# EAGLE board matchbox_ble_v01 (EAGLE 7.4.0)
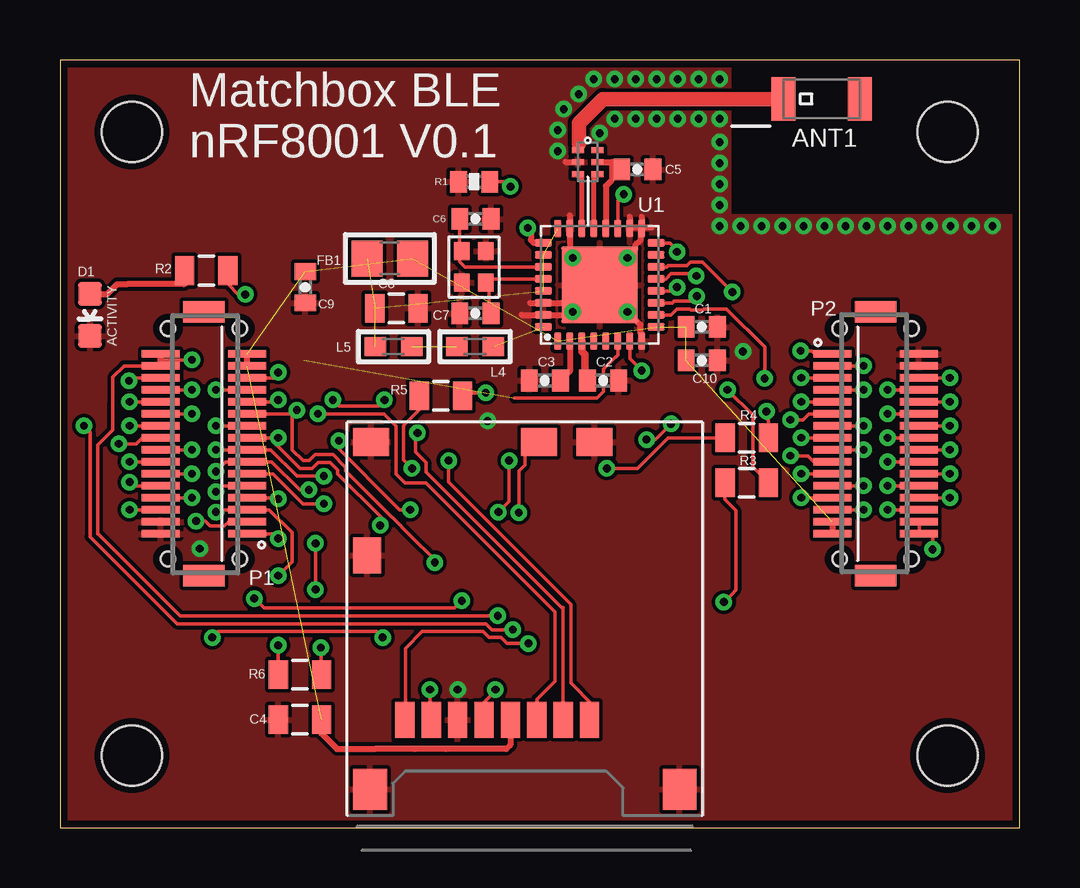
[diagram p0: board, top side]
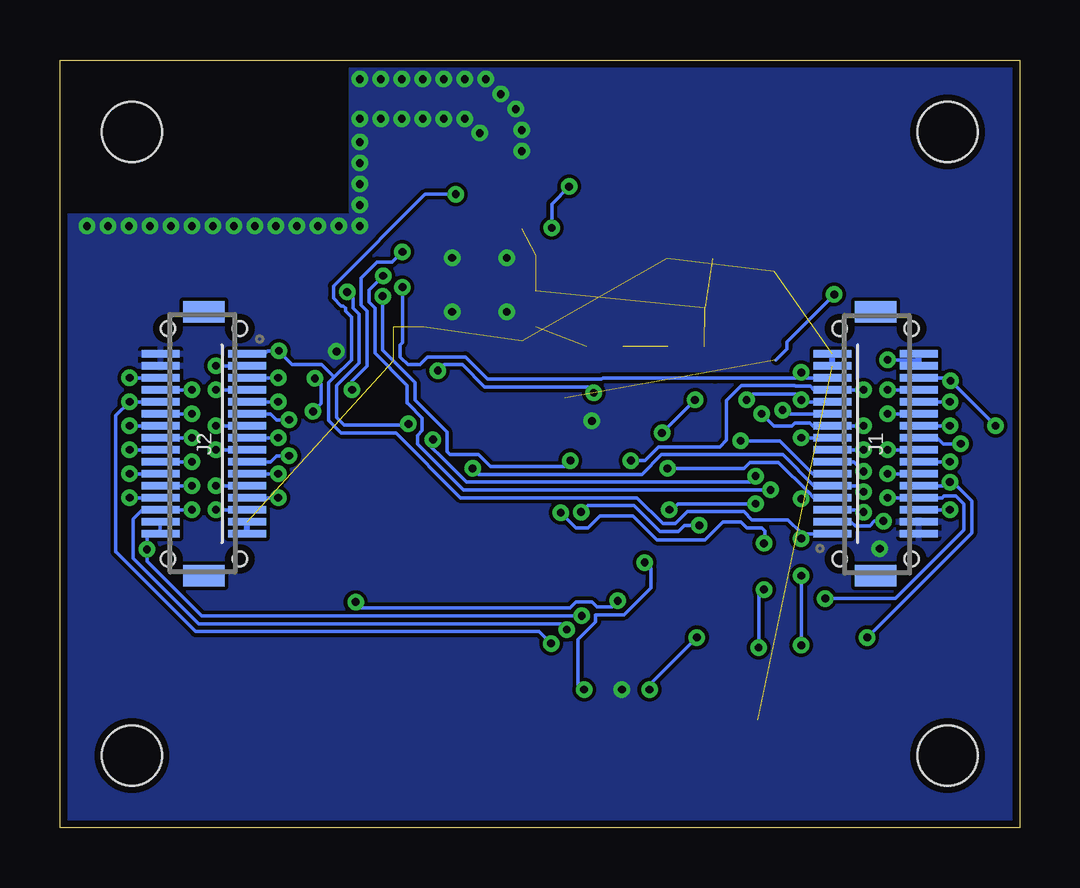
[diagram p1: board, bottom side, seen from below]

Size 40 x 32 mm. Coordinates in mm from the lower left corner, seen from the top.
Outline: 0,0 40,0 40,32 0,32 0,0
Copper layers (1*16): Top 0.0356mm / dielectric 1.5011mm / Bottom 0.0356mm
Design rules "LaenPCBOrder (2) *": minimum track width 6mil, minimum drill 13mil, track to track 6mil, track to pad 6mil, pad to pad 6mil, via to via 6mil, smd to smd 6mil, copper to edge 12mil, drill to drill 6mil, minimum pad ring 7mil, minimum via ring 7mil, stop-mask expansion 14mil, vias tented up to drill 14mil, thermal gap 6mil
Holes 2.5 mm at 3,29 37,29 37,3 3,3
tRestrict: 2 lines
bRestrict: 2 lines

## Footprints (pad centres in the part's own frame; a part is rotated, then mirrored left to right if it is on the bottom)
2450AT18A100 = smd 1 x 1.8: 1 1.6,0; 2 -1.6,0
0402-CAP = smd 0.7 x 0.9: 1 -0.65,0; 2 0.65,0
0805 = smd 0.8 x 1.2: 1 -0.9,0; 2 0.9,0
LED-0603 = smd 1 x 1: A 0,-0.877; C 0,0.877
0805' = smd 1.3 x 1.5: 1 -0.95,0; 2 0.95,0
DF12-32-DS = smd 0.3 x 1.6: 1 -3.75,1.8; 2 -3.75,-1.8; 3 -3.25,1.8; 4 -3.25,-1.8; 5 -2.75,1.8; 6 -2.75,-1.8; 7 -2.25,1.8; 8 -2.25,-1.8; 9 -1.75,1.8; 10 -1.75,-1.8; 11 -1.25,1.8; 12 -1.25,-1.8; 13 -0.75,1.8; 14 -0.75,-1.8; 15 -0.25,1.8; 16 -0.25,-1.8; 17 0.25,1.8; 18 0.25,-1.8; 19 0.75,1.8; 20 0.75,-1.8; 21 1.25,1.8; 22 1.25,-1.8; 23 1.75,1.8; 24 1.75,-1.8; 25 2.25,1.8; 26 2.25,-1.8; 27 2.75,1.8; 28 2.75,-1.8; 29 3.25,1.8; 30 3.25,-1.8; 31 3.75,1.8; 32 3.75,-1.8 | smd 0.889 x 1.727: F1 -5.5,0; F2 5.5,0 | hole 0.6: -4.8,1.5; 4.8,1.5
_0603 = smd 0.9 x 0.8: 1 -0.762,0; 2 0.762,0
DF12-32-DP = smd 0.3 x 1.6: 1 -3.75,-1.8; 2 -3.75,1.8; 3 -3.25,-1.8; 4 -3.25,1.8; 5 -2.75,-1.8; 6 -2.75,1.8; 7 -2.25,-1.8; 8 -2.25,1.8; 9 -1.75,-1.8; 10 -1.75,1.8; 11 -1.25,-1.8; 12 -1.25,1.8; 13 -0.75,-1.8; 14 -0.75,1.8; 15 -0.25,-1.8; 16 -0.25,1.8; 17 0.25,-1.8; 18 0.25,1.8; 19 0.75,-1.8; 20 0.75,1.8; 21 1.25,-1.8; 22 1.25,1.8; 23 1.75,-1.8; 24 1.75,1.8; 25 2.25,-1.8; 26 2.25,1.8; 27 2.75,-1.8; 28 2.75,1.8; 29 3.25,-1.8; 30 3.25,1.8; 31 3.75,-1.8; 32 3.75,1.8 | smd 0.889 x 1.727: F1 -5.5,0; F2 5.5,0 | hole 0.6: -4.8,1.5; 4.8,1.5
0402-RES = smd 0.7 x 0.9: 1 -0.65,0; 2 0.65,0
ATMEL_QFN32 = smd 0.711 x 0.305: 1 -2.351,1.75; 2 -2.351,1.25; 3 -2.351,0.75; 4 -2.351,0.25; 5 -2.351,-0.25; 6 -2.351,-0.75; 7 -2.351,-1.25; 8 -2.351,-1.75; 17 2.351,-1.75; 18 2.351,-1.25; 19 2.351,-0.75; 20 2.351,-0.25; 21 2.351,0.25; 22 2.351,0.75; 23 2.351,1.25; 24 2.351,1.75 | smd 0.305 x 0.711: 9 -1.75,-2.351; 10 -1.25,-2.351; 11 -0.75,-2.351; 12 -0.25,-2.351; 13 0.25,-2.351; 14 0.75,-2.351; 15 1.25,-2.351; 16 1.75,-2.351; 25 1.75,2.351; 26 1.25,2.351; 27 0.75,2.351; 28 0.25,2.351; 29 -0.25,2.351; 30 -0.75,2.351; 31 -1.25,2.351; 32 -1.75,2.351 | smd 3.2 x 3.2: EXP 0,0
2450BM14A0002 = smd 0.25 x 0.5: 1 0.5,0.4; 2 0,0.4; 3 -0.5,0.4; 4 -0.5,-0.4; 5 0,-0.4; 6 0.5,-0.4
MOLEX_MICROSD_PP = smd 0.8 x 1.5: 1 -2.7,-3.75; 2 -1.6,-3.75; 3 -0.5,-3.75; 4 0.6,-3.75; 5 1.7,-3.75; 6 2.8,-3.75; 7 3.9,-3.75; 8 5,-3.75 | smd 1.5 x 1.15: DET -0.6,-15.325; M3 -2.9,-15.325; M4 6.4,-15.325 | smd 1.4 x 1.7: M1 -6.45,-0.85; M2 6.45,-0.85 | smd 1.15 x 1.5: M5 6.575,-10.6
ABM11 = smd 0.75 x 0.65: 1 -0.65,-0.5; 2 0.65,-0.5; 3 0.65,0.5; 4 -0.65,0.5

## Placement (x,y rotation side)
ANT1  ANT1  [2450AT18A100]  31.75,30.38 180 top
C1  0.1uF  [0402-CAP]  26.75,20.88 0 top
C2  33nF  [0402-CAP]  22.64,18.64 0 top
C3  0.1uF  [0402-CAP]  20.21,18.64 180 top
C4  1uF  [0805]  10,4.5 180 top
C5  2.2nF  [0402-CAP]  24.06,27.44 0 top
C6  8.2pF  [0402-CAP]  17.31,25.38 0 top
C7  8.2pF  [0402-CAP]  17.31,21.44 180 top
C8  0.1µF  [0805]  14.03,21.65 0 top
C9  2.2nF  [0402-CAP]  10.22,22.52 270 top
C10  1uF  [0402-CAP]  26.75,19.48 0 top
D1  BLUE  [LED-0603]  1.25,21.38 180 top
FB1  MMZ1608B121C  [0805']  13.75,23.73 180 top
J1  DF12-32-DS  [DF12-32-DS]  6,16 90 bottom
J2  DF12-32-DS  [DF12-32-DS]  34,16 270 bottom
L4  10µH  [_0603]  17.3,20.05 180 top
L5  15nH  [_0603]  13.9,20.05 180 top
P1  DF12-32-DP  [DF12-32-DP]  6,16 90 top
P2  DF12-32-DP  [DF12-32-DP]  34,16 270 top
R1  22K  [0402-RES]  17.26,26.93 180 top
R2  1K  [0805]  6.1,23.23 0 top
R3  0K  [0805]  28.62,14.38 0 top
R4  0K  [0805]  28.62,16.25 0 top
R5  0K  [0805]  15.88,18 0 top
R6  0K  [0805]  10,6.38 0 top
U1  NRF8001  [ATMEL_QFN32]  22.5,22.62 90 top
U5  2450BM14A0002  [2450BM14A0002]  22,27.75 90 top
U$1  MOLEX_MICROSD_PP  [MOLEX_MICROSD_PP]  19.38,0.75 180 top
Y1  8Y-16.000MAAV-T  [ABM11]  17.25,23.38 270 top

## Library data of the parts
ANT1 = tinycircuits; PARTNO: AS-ITM-00132
C1-C7 C9 C10 R1-R6 = SparkFun-Passives
C8 = SparkFun-Capacitors
D1 = SparkFun-LED
FB1 L4 L5 = microbuilder
J1 J2 = micro1292; PARTNO: AS-ITM-00012
P1 P2 = micro1292; PARTNO: AS-ITM-00015
U1 = rf_ble
U5 = tinycircuits; PARTNO: AS-ITM-00114
U$1 = molexmicrosd
Y1 = micro1292; PARTNO: AS-ITM-00228

## Nets
ACTIVE: R2.2 U1.6
ANT1: U1.21 U5.4
ANT2: U1.22 U5.3
AVDD: C8.1 FB1.2 L5.2 U1.24 U1.26 U1.29
DCC: L4.1 U1.32
DET: R6.2 U$1.DET
GND: C1.2 C2.2 C3.2 C4.2 C5.2 C6.2 C7.2 C8.2 C9.2 C10.2 D1.C J1.2 J1.4 J2.2 J2.4 P1.2 P1.4 P2.2 P2.4 R1.2 U1.8 U1.17 U1.18 U1.23 U1.30 U1.31 U1.EXP U5.2 U$1.6 U$1.M1 U$1.M2 U$1.M3 U$1.M4 U$1.M5 Y1.2 Y1.4
N$1: R1.1 U1.25
N$2: C6.1 U1.27 Y1.1
N$3: L4.2 L5.1
N$4: C3.1 U1.2
N$5: C2.1 U1.3
N$8: ANT1.1 U5.1
N$9: C7.1 U1.28 Y1.3
N$10: D1.A R2.1
PA0: J2.26 P2.26
PA1: J2.24 P2.24
PA2: J2.22 P2.22
PA3: J2.20 P2.20
PA4: J2.27 P2.27
PA5: J2.25 P2.25
PA6: J2.23 P2.23
PA7: J2.21 P2.21
PA8: J2.8 P2.8
PA9: J1.8 P1.8 R3.1
PA13: J2.6 P2.6
PA14: J1.11 P1.11
PA15: J1.27 P1.27 U1.12
PB0: J2.15 P2.15
PB1: J2.13 P2.13
PB2: J2.11 P2.11
PB3: J1.17 P1.17 U1.11
PB4: J1.15 P1.15 U1.14
PB5: J1.13 P1.13 U1.13
PB6: J1.9 P1.9 R4.1
PB7: J1.7 P1.7 R5.1
PB8: J1.5 P1.5 R6.1
PB9: J1.3 P1.3
PB10: J2.9 P2.9
PB11: J2.7 P2.7
PB12: J2.18 P2.18
PB13: J2.16 P2.16
PB14: J2.14 P2.14
PB15: J2.12 P2.12
PC0: J1.12 P1.12
PC1: J1.14 P1.14
PC2: J1.16 P1.16
PC3: J1.18 P1.18
PC4: J1.20 P1.20
PC5: J1.22 P1.22
PC6: J1.24 P1.24
PC7: J1.26 P1.26
PC8: J1.10 P1.10 U$1.7
PC9: J2.10 P2.10 U$1.8
PC10: J1.25 P1.25 U$1.1
PC11: J1.23 P1.23 U$1.2
PC12: J1.21 P1.21 U$1.5
PC13: J1.6 P1.6
PD2: J1.19 P1.19 U$1.3
PWR_ON: J1.28 J2.28 P1.28 P2.28
RDYN: R3.2 U1.16
RESET#: J1.1 J2.1 P1.1 P2.1 U1.19
RSV0: J2.3 P2.3
RSV1: J2.5 P2.5
RSV2: J2.17 P2.17
RSV3: J2.19 P2.19
RXD: R4.2 U1.10
TXD: R5.2 U1.7
VCC: J1.30 J1.32 J2.30 J2.32 P1.30 P1.32 P2.30 P2.32
VCC_3V3: C1.1 C4.1 C9.1 C10.1 FB1.1 J1.29 J1.31 J2.29 J2.31 P1.29 P1.31 P2.29 P2.31 U1.1 U1.9 U$1.4
VDD_PA: C5.1 U1.20 U5.5

## Tracks (layer width: path | path; a pad name or v marks a point on that pad's centre or on a via)
ACTIVE  (via drill 0.33)  (1 unrouted)
  Top 0.152: 23.25,20.25 U1.6 | 23.25,20.18 U1.6 | 23.25,20.1 U1.6 | v7.72,22.23 7.42,22.23 7,22.65 R2.2 | 18.95,17.9 22.38,17.9 22.65,18.18 22.65,19.12 23.15,19.62 23.18,19.62 23.25,19.7 23.25,20.02 U1.6
  Bottom 0.152: v7.72,22.23 9.7,20.25 9.7,20 9.7,19.95 10.15,19.5
ANT1
  Top 0.2: U1.21 22.25,27.1 U5.4
ANT2
  Top 0.2: U1.22 21.75,27.1 U5.3
AVDD  (5 unrouted)
DCC  (1 unrouted)
DET  (via drill 0.33)
  Top 0.152: v19.12,13.12 19.12,14.88 19.38,15.12 19.38,16 19.5,16.12 19.93,16.12 U$1.DET | v10.88,7.5 10.88,6.38 R6.2 | v10.65,11.85 v10.65,9.93
  Bottom 0.152: v19.12,13.12 18.5,12.5 18,12.5 17.5,13 16.12,13 15.12,12 13.12,12 12.38,12.75 11.62,12.75 11.38,12.5 10.75,12.5 10.62,12.38 10.62,11.88 v10.65,11.85 | v10.65,9.93 10.88,9.7 v10.88,7.5
GND  (via drill 0.33)
  Top 0.152: 21.25,21.38 v21.38,21.5 | 22.18,22.62 U1.EXP v21.38,23.75 | 24.07,25.02 24.25,25.02 | v23.65,23.75 23.98,24.07 | 24.2,24.98 U1.17
  Top 0.254: U1.31 20.32,21.38 | 20.32,21.38 21.25,21.38 | 21.25,25.52 21.25,23.95 | U1.8 24.25,20.55 24.2,20.6 24.2,20.95 v23.65,21.5 | 23.73,25.02 23.75,25.02 | 23.75,25.02 24.07,25.02 24.25,25.02 | 24.25,25.02 24.27,25.02 | 19.25,21.38 20.32,21.38 | 19.6,21.88 20.9,21.88 | 21.07,27.75 21.38,27.75 | 24.25,25.45 24.25,25.02 | 24.25,25.02 24.2,24.98 24.2,24.5 23.98,24.27 23.98,24.18 23.98,24.07 | 23.75,25.45 23.75,25.02 | 24.35,25.02 24.68,25.02
  other vias: 27.5,29.55 26.62,29.55 25.75,29.55 24.88,29.55 24,29.55 23.12,29.55 27.5,31.2 26.62,31.2 25.75,31.2 24.88,31.2 24,31.2 23.12,31.2 22.25,31.2 21.62,30.57 21,29.95 27.5,28.57 27.5,27.7 27.5,26.82 27.5,25.95 22.5,28.95 20.75,29.07 20.75,28.2 28.38,25.07 29.25,25.07 30.12,25.07 31,25.07 31.88,25.07 32.75,25.07 33.62,25.07 34.5,25.07 35.38,25.07 36.25,25.07 37.12,25.07 38,25.07 27.5,25.07 38.88,25.07 17.82,16.95 5.83,11.62 16.57,5.75 28.48,19.85
  pour Top: 0,0 40,0 40,32 0,32
  pour Bottom: 0,0 40,0 40,32 0,32
N$1  (via drill 0.33)
  Top 0.152: R1.1 18.57,26.93 v18.77,26.73
  Top 0.254: v19.5,25 19.62,24.88 19.62,24.5 19.75,24.38 20.12,24.38 U1.25
  Bottom 0.152: v19.5,25 19.5,26 v18.77,26.73
N$2
  Top 0.152: U1.27 18.38,23.38 18.25,23.38 16.88,23.38 16.81,23.44 16.75,23.5 16.66,23.59 16.66,24.11 C6.1
  Top 0.2: 16.66,24.11 Y1.1
N$3  (1 unrouted)
N$4
  Top 0.254: U1.2 21.25,19.02 C3.1
N$5
  Top 0.305: C2.1 21.88,18.75 21.88,19.73 21.75,19.85 21.75,20.25 U1.3
N$8
  Top 0.152: 21.62,28.3 21.62,28.51
  Top 0.254: 21.62,28.3 21.62,28.25 U5.1
  Top 0.61: 21.62,28.51 21.62,29.38 22.62,30.38 ANT1.1
N$9
  Top 0.152: U1.28 17.89,22.88 17.89,21.51 C7.1
  Top 0.2: Y1.3 17.89,22.88
N$10
  Top 0.254: D1.A 1.98,22.25 2.38,22.65 2.8,22.65 5.17,22.65 5.2,22.68 R2.1
PA0  (via drill 0.33)
  Top 0.152: v37.1,13.75 35.83,13.75 J2.26
  Bottom 0.152: v37.1,13.75 35.83,13.75 J2.26
PA1  (via drill 0.33)
  Top 0.152: v34.5,14.25 J2.24 | J2.24
  Bottom 0.152: J2.24 v34.5,14.25 | J2.24
PA2  (via drill 0.33)
  Top 0.152: v37.1,14.75 35.83,14.75 J2.22
  Bottom 0.152: v37.1,14.75 35.83,14.75 J2.22
PA3  (via drill 0.33)
  Top 0.152: v34.5,15.25 J2.20 | J2.20
  Bottom 0.152: J2.20 v34.5,15.25 | J2.20
PA4  (via drill 0.33)
  Top 0.152: v33.5,13.25 J2.27 | J2.27
  Bottom 0.152: J2.27 v33.5,13.25 | J2.27
PA5  (via drill 0.33)
  Top 0.152: v30.9,13.75 32.17,13.75 J2.25
  Bottom 0.152: v30.9,13.75 32.17,13.75 J2.25
PA6  (via drill 0.33)
  Top 0.152: v33.5,14.25 J2.23 | J2.23
  Bottom 0.152: J2.23 v33.5,14.25 | J2.23
PA7  (via drill 0.33)
  Top 0.152: v30.9,14.75 32.17,14.75 J2.21
  Bottom 0.152: v30.9,14.75 32.17,14.75 J2.21
PA8  (via drill 0.33)
  Top 0.152: v34.5,18.25 J2.8 | J2.8
  Bottom 0.152: J2.8 v34.5,18.25 | J2.8
PA9  (via drill 0.33)
  Top 0.152: v5.5,13.75 J1.8 | J1.8 | v16.75,9.45 16.45,9.15 8.5,9.15 v8.1,9.55 | v27.68,9.4 28,9.72 28.18,9.9 28.18,13.22 27.73,13.68 R3.1
  Bottom 0.152: v5.5,13.75 4.28,13.75 J1.8 4.12,13.75 3.23,13.75 3.15,13.82 2.65,13.82 2.33,13.5 2.33,12.4 5.17,9.55 v8.1,9.55 | v16.75,9.45 17,9.2 17.62,9.2 17.82,9.4 18.5,9.4 18.75,9.15 26.65,9.15 26.73,9.15 27.43,9.15 v27.68,9.4
PA13  (via drill 0.33)
  Top 0.152: v37.1,18.75 35.83,18.75 J2.6
  Bottom 0.152: v37.1,18.75 35.83,18.75 J2.6
PA14  (via drill 0.33)
  Top 0.152: v11.62,16.12 11.62,15.78 13.9,13.5 14.15,13.25 v14.6,13.25 | v11,13.5 10.12,13.5 8.88,14.75 7.83,14.75 J1.11
  Bottom 0.152: v11.62,16.12 10,16.12 8.62,14.75 7.83,14.75 J1.11 | v11,13.5 14.25,13.5 14.5,13.25 v14.6,13.25
PA15  (via drill 0.33)
  Top 0.152: v25.73,22.52 25.57,22.38 24.88,22.38 U1.12 | v9.1,18.98 9.1,18.75 7.83,18.75 J1.27
  Bottom 0.152: v25.73,22.52 25.73,20.23 25.82,20.12 25.82,19.62 25.77,19.57 25.5,19.3 25,19.3 24.68,19.62 24.6,19.62 23.1,19.62 22.18,18.7 22.1,18.7 17.43,18.7 17.38,18.75 12.78,18.75 12.7,18.75 12.62,18.75 9.1,18.75 | 9.1,18.75 7.83,18.75 J1.27 | 9.1,18.75 9.1,18.82 v9.1,18.98 9.1,18.75
PB0  (via drill 0.33)
  Top 0.152: v30.9,16.25 32.17,16.25 J2.15
  Bottom 0.152: v30.9,16.25 32.17,16.25 J2.15
PB1  (via drill 0.33)
  Top 0.152: v33.5,16.75 J2.13 | J2.13
  Bottom 0.152: J2.13 v33.5,16.75 | J2.13
PB2  (via drill 0.33)
  Top 0.152: v30.45,17 30.98,17 31.23,17.25 32.17,17.25 J2.11
  Bottom 0.152: v30.45,17 30.98,17 31.23,17.25 32.17,17.25 J2.11
PB3  (via drill 0.33)
  Top 0.152: U1.11 25.52,21.88 25.6,21.95 26.35,21.95 v26.55,22.15 | v18.73,15.3 18.73,13.6 v18.27,13.15 | J1.17 v9.1,16.25 9,16.15 9,15.97 10,14.97 10.5,14.97 10.75,15.22 11.25,15.22 11.57,14.9 11.57,14.75 13.4,12.93 13.4,12.53 13.35,12.57 v13.35,12.6
  Bottom 0.152: v26.55,22.15 26.55,19.9 25.2,18.55 25.2,17.82 23.88,16.5 23.88,15.68 23.75,15.55 22.55,15.55 22.05,15.05 18.98,15.05 v18.73,15.3 | v9.1,16.25 J1.17 | v13.35,12.6 13.97,12.6 14.22,12.35 15,12.35 16.07,13.43 18,13.43 v18.27,13.15
PB4  (via drill 0.33)
  Top 0.152: v11,14.65 9.88,14.65 8.78,15.75 J1.15 7.75,15.75 v6.5,15.75 | v24.45,16.18 24.82,16.18 v25.48,16.82 | U1.14 24.88,23.38 25.3,23.38 25.35,23.43 26,23.43 26.12,23.43 26.27,23.57 26.77,23.57 v28.02,22.32
  Bottom 0.152: v11,14.65 11.25,14.4 22.7,14.4 22.77,14.4 23.05,14.4 23.23,14.57 23.93,15.28 23.98,15.32 24.65,16 24.65,16.1 24.52,16.1 v24.45,16.18 | J1.15 6.55,15.75 v6.5,15.75 | v25.48,16.82 25.52,16.77 28.15,16.77 28.2,16.82 28.48,17.1 28.48,18.43 27.52,19.38 27.52,19.55 27.52,21.4 27.57,21.45 27.77,21.65 27.77,22.07 v28.02,22.32
PB5  (via drill 0.33)
  Top 0.152: U1.13 25.25,22.88 25.48,23.1 26.43,23.1 v26.52,23 | v10.38,14.07 10,14.07 8.82,15.25 J1.13 6.9,15.25 v6.5,14.85
  Bottom 0.152: 26.6,22.93 v26.52,23 27.12,22.4 27.12,22.32 27.12,21.9 26.88,21.65 26.88,21.62 26.88,19.77 25.57,18.48 25.52,18.43 25.52,17.7 25.48,17.65 24.9,17.07 24.9,16.55 25.1,16.35 25.1,16 24.48,15.38 24.43,15.32 24.07,14.97 24.02,14.93 23.43,14.32 23.18,14.07 22.9,14.07 22.82,14.07 v10.38,14.07 | J1.13 6.9,15.25 v6.5,14.85
PB6  (via drill 0.33)
  Top 0.152: R4.1 25.35,16.25 24.07,14.97 v22.8,14.97 | J1.9 6.75,14.25 v6.5,14 | J1.9
  Bottom 0.152: v6.5,14 6.53,14.03 6.75,14.25 7.78,14.25 J1.9 7.83,14.25 8.57,14.25 9.88,15.55 14.93,15.55 15.75,14.72 18.98,14.72 19.05,14.72 21.8,14.72 22.55,14.72 v22.8,14.97
PB7  (via drill 0.33)
  Top 0.152: v9.1,13.7 9.05,13.75 7.83,13.75 J1.7 | v14.68,14.97 14.32,15.32 14.32,16.75 14.35,16.77 14.97,17.4 R5.1
  Bottom 0.152: v14.68,14.97 11.5,14.97 11.25,15.22 10.05,15.22 8.81,13.99 | 8.81,13.99 8.57,13.75 7.83,13.75 J1.7 | v9.1,13.7 8.85,13.95 8.81,13.99
PB8  (via drill 0.33)
  Top 0.152: J1.5 6.6,13.25 v6.5,13.15 | J1.5 | v9.1,7.6 R6.1 | v9.1,10.5 9.68,11.07 9.68,12.3 8.72,13.25 7.85,13.25 J1.5
  Bottom 0.152: v6.5,13.15 6.6,13.25 J1.5 | J1.5 | v9.1,10.5 v9.1,7.6
PB9  (via drill 0.33)
  Top 0.152: v5.67,12.78 6.05,12.78 6.25,12.57 6.85,12.57 7.03,12.75 J1.3 | J1.3
  Bottom 0.152: J1.3 7.03,12.75 6.85,12.57 6.25,12.57 6.05,12.78 v5.67,12.78 | J1.3
PB10  (via drill 0.33)
  Top 0.152: v30.9,17.75 32.17,17.75 J2.9
  Bottom 0.152: v30.9,17.75 32.17,17.75 J2.9
PB11  (via drill 0.33)
  Top 0.152: v33.5,18.25 J2.7 | J2.7
  Bottom 0.152: J2.7 v33.5,18.25 | J2.7
PB12  (via drill 0.33)
  Top 0.152: v37.1,15.75 35.83,15.75 J2.18
  Bottom 0.152: v37.1,15.75 35.83,15.75 J2.18
PB13  (via drill 0.33)
  Top 0.152: v34.5,16.25 J2.16 | J2.16
  Bottom 0.152: J2.16 v34.5,16.25 | J2.16
PB14  (via drill 0.33)
  Top 0.152: v37.1,16.75 35.83,16.75 J2.14
  Bottom 0.152: v37.1,16.75 35.83,16.75 J2.14
PB15  (via drill 0.33)
  Top 0.152: v34.5,17.25 J2.12 | J2.12
  Bottom 0.152: J2.12 v34.5,17.25 | J2.12
PC0  (via drill 0.33)
  Top 0.152: v5.5,14.75 J1.12 | J1.12
  Bottom 0.152: J1.12 v5.5,14.75 | J1.12
PC1  (via drill 0.33)
  Top 0.152: v2.9,15.25 4.17,15.25 J1.14
  Bottom 0.152: v2.9,15.25 4.17,15.25 J1.14
PC2  (via drill 0.33)
  Top 0.152: v5.5,15.75 J1.16 | J1.16
  Bottom 0.152: J1.16 v5.5,15.75 | J1.16
PC3  (via drill 0.33)
  Top 0.152: v2.45,16 3.17,16 3.42,16.25 4.17,16.25 J1.18
  Bottom 0.152: v2.45,16 3.17,16 3.42,16.25 4.17,16.25 J1.18
PC4  (via drill 0.33)
  Top 0.152: v2.9,16.75 4.17,16.75 J1.20
  Bottom 0.152: v2.9,16.75 4.17,16.75 J1.20
PC5  (via drill 0.33)
  Top 0.152: v5.5,17.25 J1.22 | J1.22
  Bottom 0.152: J1.22 v5.5,17.25 | J1.22
PC6  (via drill 0.33)
  Top 0.152: v2.9,17.75 4.17,17.75 J1.24
  Bottom 0.152: v2.9,17.75 4.17,17.75 J1.24
PC7  (via drill 0.33)
  Top 0.152: v5.5,18.25 J1.26 | J1.26
  Bottom 0.152: J1.26 v5.5,18.25 | J1.26
PC8  (via drill 0.33)
  Top 0.152: v2.9,14.4 2.9,14.25 4.17,14.25 J1.10 | v13.45,7.92 13.2,8.18 6.6,8.18 v6.35,7.92 | v15.43,5.75 15.43,5.28 15.47,5.22 U$1.7
  Bottom 0.152: 2.9,14.25 4.17,14.25 J1.10 | 2.9,14.25 2.62,14.25 2,13.62 2,12.28 2.05,12.22 v6.35,7.92 | v2.9,14.4 2.9,14.32 2.9,14.25 | v13.45,7.92 15.43,5.95 v15.43,5.75
PC9  (via drill 0.33)
  Top 0.152: v37.1,17.75 35.83,17.75 J2.10 | v19.52,7.67 18.62,7.67 18.38,7.92 17.88,7.92 17.62,8.18 17.55,8.18 15.1,8.18 14.4,7.47 14.4,5.25 14.38,5.22 U$1.8
  Bottom 0.152: J2.10 35.83,17.75 36.92,17.75 v37.1,17.75 37.67,17.18 37.67,11.5 37.62,11.45 34.35,8.18 20.02,8.18 v19.52,7.67
PC10  (via drill 0.33)
  Top 0.152: v16.2,15.3 16.2,14.4 16.25,14.35 21.3,9.3 21.3,6.03 21.4,5.92 22.07,5.25 U$1.1 | v6.5,18.25 J1.25 | J1.25
  Bottom 0.152: v16.2,15.3 15.62,15.3 15.57,15.35 15.05,15.88 12.5,15.88 12.22,16.15 12.22,17.8 11.6,18.43 9.38,18.43 9.35,18.4 8.8,18.4 8.72,18.4 8.57,18.25 7.83,18.25 J1.25 7.72,18.25 v6.5,18.25
PC11  (via drill 0.33)
  Top 0.152: U$1.2 20.98,9.18 20.9,9.18 15.25,14.82 15.25,15.22 14.88,15.6 14.82,15.65 14.82,16.1 14.82,16.38 v14.9,16.45 | 8.32,17.75 7.83,17.75 J1.23 | 8.32,17.75 8.7,17.75 | v9.1,17.82 9.03,17.75 8.32,17.75 | v13.53,17.82 13.28,17.57 11.62,17.57 v11.38,17.82
  Bottom 0.152: J1.23 7.83,17.75 9.03,17.75 v9.1,17.82 9.35,18.07 11.12,18.07 v11.38,17.82 | v13.53,17.82 v14.9,16.45
PC12  (via drill 0.33)
  Top 0.152: J1.21 7.83,17.25 9.68,17.25 9.7,17.23 9.75,17.27 v9.88,17.4 9.68,17.2 9.68,15.75 10.12,15.3 10.18,15.3 10.38,15.3 10.62,15.55 11.38,15.55 11.85,15.07 11.9,15.03 11.9,14.88 13.82,12.95 13.88,12.9 14.6,12.18 15.62,11.15 v15.62,11.05 | v18.15,5.75 18.15,5.7 17.68,5.22 U$1.5
  Bottom 0.152: v9.88,17.4 9.72,17.25 7.83,17.25 J1.21 | v15.62,11.05 15.38,10.8 15.38,10.25 15.38,10 16.5,8.88 17.62,8.88 17.68,8.88 17.68,8.8 17.68,8.57 18.4,7.85 18.4,5.95 18.32,5.88 18.27,5.88 v18.15,5.75
PC13  (via drill 0.33)
  Top 0.152: v2.9,13.25 4.17,13.25 J1.6
  Bottom 0.152: v2.9,13.25 4.17,13.25 J1.6
PD2  (via drill 0.33)
  Top 0.152: v6.5,16.75 J1.19 | J1.19 | U$1.3 19.88,5.35 20.62,6.1 20.62,9 15.25,14.38 14.38,14.38 14,14.75 14,15.12 14,15.6 14,16.75 13.5,17.25 v10.75,17.25
  Bottom 0.152: 7.9,16.82 7.83,16.75 J1.19 | v6.5,16.75 7.72,16.75 J1.19 | v10.75,17.25 10.25,16.75 9.5,16.75 9.38,16.88 8.75,16.88 8.62,16.75 7.88,16.75 J1.19
PWR_ON  (via drill 0.33)
  Top 0.152: v1,16.75 1.25,16.5 1.25,12.12 1.3,12.07 4.88,8.5 16.75,8.5 16.8,8.5 17.75,8.5 18,8.25 v18.88,8.25 | J1.28 3,18.75 v2.88,18.62 | v34.5,13.25 J2.28 | J2.28
  Bottom 0.152: 3,18.75 v2.88,18.62 | v2.88,18.62 v1,16.75 | 3,18.75 4.12,18.75 J1.28 3,18.75 | v2.88,18.62 3,18.75 | J2.28 v34.5,13.25 | J2.28 | J2.28 35.85,13.25 36.58,13.25 36.95,12.88 36.95,11.22 36.9,11.18 34.23,8.5 20.85,8.5 19.12,8.5 v18.88,8.25
RDYN  (via drill 0.33)
  Top 0.152: R3.2 28.88,15.03 28.88,17.2 v27.82,18.25 | U1.16 25.43,24.38 25.73,24.07 v25.73,24
  Bottom 0.152: v27.82,18.25 27.82,18.62 27.2,19.25 27.2,21.52 27.45,21.77 27.45,22.9 26.77,23.57 26.15,23.57 v25.73,24
RESET#  (via drill 0.33)
  Top 0.152: J2.1 31.48,19.75 31.35,19.88 v30.88,19.88 | v23.5,26.4 23.25,26.15 U1.19 | J1.1 9.1,12.25 v9.1,12.05
  Bottom 0.152: J2.1 31.48,19.75 31.35,19.88 v30.88,19.88 30.88,19.85 30.32,19.3 29.1,19.3 28.57,18.77 | 9.1,12.25 9.1,12.28 9.65,12.82 11.15,12.82 11.5,13.18 13.85,13.18 14.35,12.68 14.88,12.68 15.95,13.75 23.3,13.75 26,16.45 28.27,16.45 28.8,16.98 28.8,18.55 28.57,18.77 | 9.1,12.25 J1.1 | 9.1,12.25 v9.1,12.05 | 28.57,18.77 27.85,19.5 27.85,21.27 28.1,21.52 28.1,21.65 28.2,21.75 28.27,21.75 28.6,22.07 28.6,22.57 24.77,26.4 v23.5,26.4
RSV0  (via drill 0.33)
  Top 0.152: v33.5,19.25 J2.3 | J2.3
  Bottom 0.152: J2.3 v33.5,19.25 | J2.3
RSV1  (via drill 0.33)
  Top 0.152: v30.9,18.75 32.17,18.75 J2.5
  Bottom 0.152: v30.9,18.75 32.17,18.75 J2.5
RSV2  (via drill 0.33)
  Top 0.152: P2.17 v33.5,15.75 | P2.17
  Bottom 0.152: v33.5,15.75 P2.17 | P2.17
RSV3  (via drill 0.33)
  Top 0.152: v30.45,15.5 31.18,15.5 31.43,15.25 32.17,15.25 P2.19
  Bottom 0.152: v30.45,15.5 30.98,15.5 31.23,15.25 32.17,15.25 P2.19
RXD  (via drill 0.33)
  Top 0.152: v29.45,17.35 29.45,17.05 29.52,16.98 R4.2 | v29.38,18.73 29.38,20.02 27.77,21.62 26.85,21.62 26.8,21.57 26.57,21.57 26.52,21.57 26.3,21.57 26.25,21.62 25.73,21.62 25.48,21.38 24.88,21.38 U1.10
  Bottom 0.152: v29.45,17.35 29.12,17.68 29.12,18.5 29.3,18.68 29.35,18.73 v29.38,18.73
TXD  (via drill 0.33)
  Top 0.152: U1.7 23.75,20.25 U1.7 | v17.75,18.12 16.75,18.12 16.75,18 R5.2 | U1.7 23.75,20.18 23.75,19.6 23.75,19.55 v24.25,19.05
  Bottom 0.152: v17.75,18.12 18,18.38 22.25,18.38 22.3,18.38 23.23,19.3 23.85,19.3 24,19.3 v24.25,19.05
VCC  (via drill 0.33)
  Top 0.152: v18.25,8.82 5,8.82 1.68,12.15 1.62,12.2 1.57,12.25 1.57,15.95 2.2,16.57 2.2,17.7 2.2,18.77 2.67,19.25 4.08,19.25 J1.30 | v5.5,19.5 4.33,19.5 4.2,19.5 | 35.83,12.75 35.83,12.25 J2.32 | 35.83,12.75 J2.30 35.83,12.75 | 35.83,12.75 35.83,12.18 36.38,12.18 v36.38,11.6
  Top 0.254: 4.2,19.5 J1.32 4.2,19.5 | 4.2,19.5 J1.30 4.2,19.5
  Bottom 0.152: v5.5,19.5 4.33,19.5 4.2,19.5 | J2.30 35.83,12.75 35.83,12.25 J2.32 35.9,12.25 36.35,12.25 36.38,12.22 v36.38,11.6 36.38,11.1 36.35,11.07 34.1,8.82 23.18,8.82 23.1,8.82 23.07,8.82 20.57,8.82 20.5,8.82 v18.25,8.82
  Bottom 0.254: J1.30 4.2,19.5 J1.32
VCC_3V3  (10 unrouted)
  Top 0.254: J1.29 J1.31 | C4.1 10.9,3.92 11.55,3.27 13.12,3.27 14.8,3.27 16.1,3.27 18.6,3.27 18.77,3.45 U$1.4 | J2.29 J2.31
  Bottom 0.254: 32.17,12.75 J2.29 J2.31 | J1.29 J1.31 J1.29
VDD_PA
  Top 0.254: 23,27.75 23.41,27.75 C5.1 | U5.5 22.5,27.75 23,27.75 | U1.20 22.75,26.75 23,27 23,27.75

## Text on the board
tPlace: ACTIVITY
tNames: Matchbox BLE / nRF8001 V0.1